# Altium PCB PCB1.PcbDoc (part 5 of 6)
Units mil, origin at the board's own origin, x right, y up, seen from the top; angles counter-clockwise.
Board outline 58000 x 19845 mil, 4 copper layers (Top Layer, MidLayer1, MidLayer2, Bottom Layer); 162 components, 222 nets, 4894 pads, 2245 vias.
Unrouted connection lines stored in the file: 192.
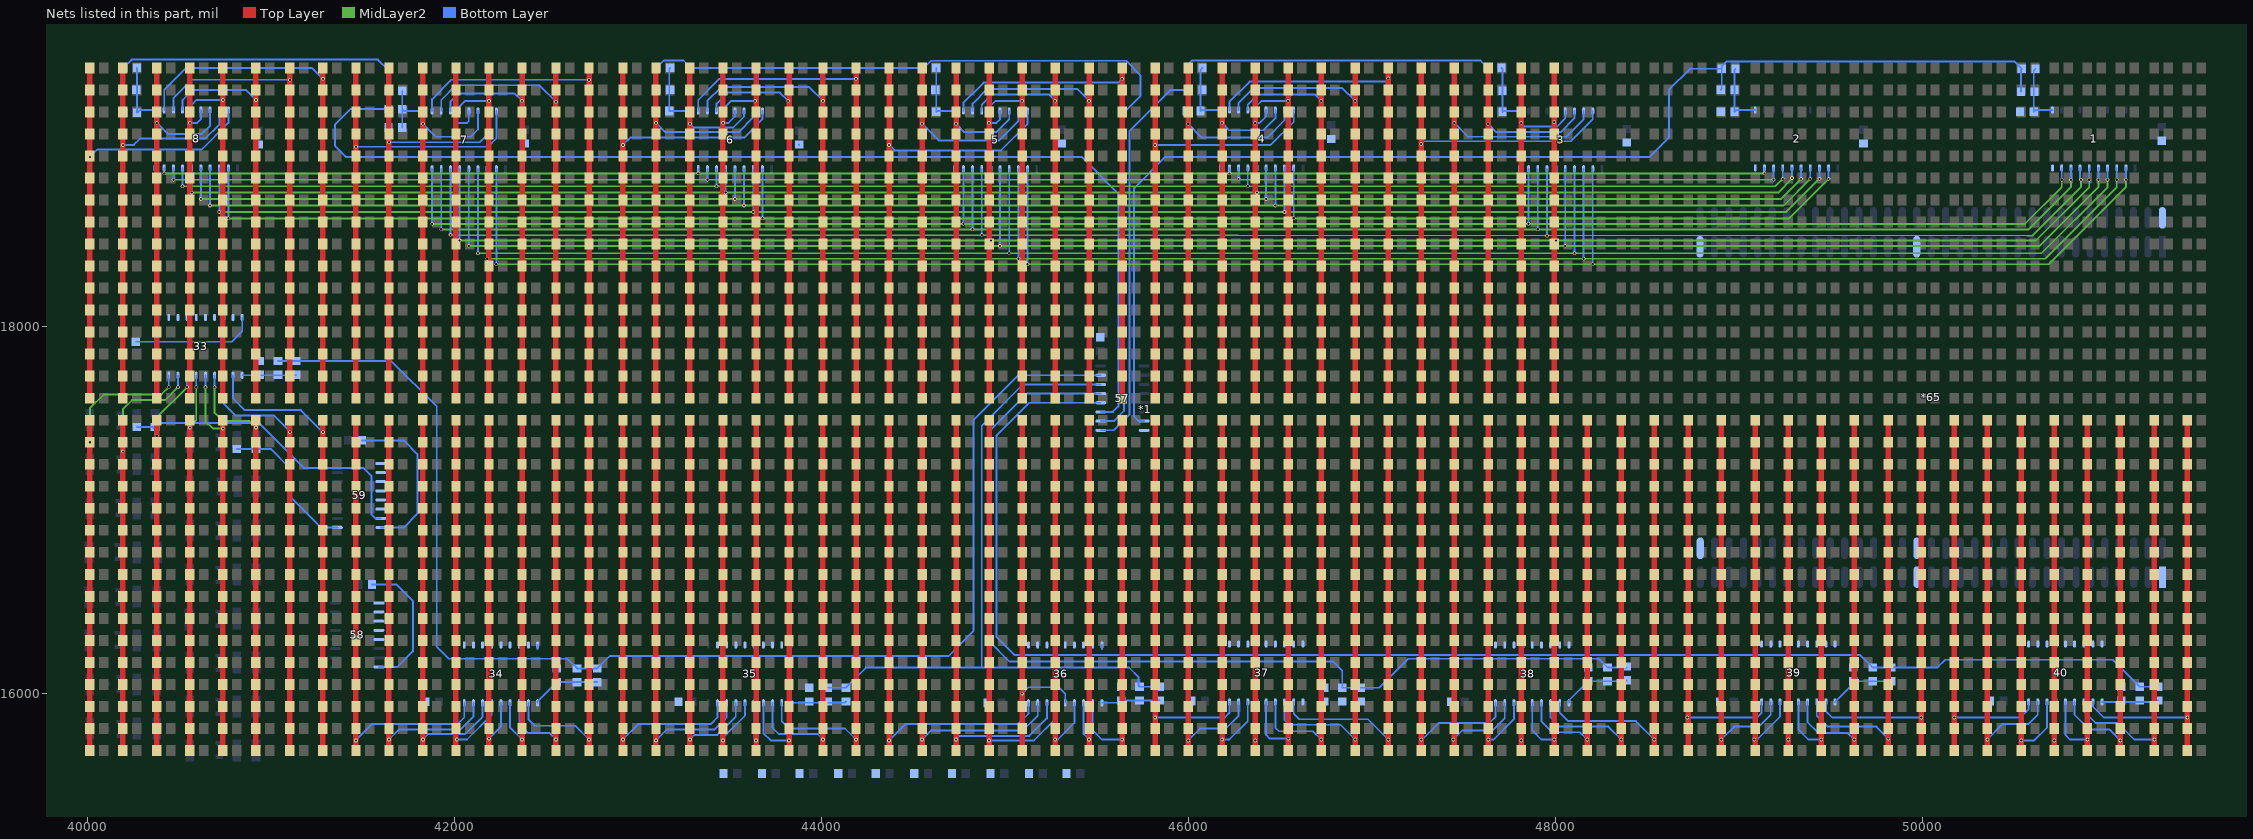
[diagram p7: the nets of this part, all layers, seen from the top]

## Via types
v1: diameter 20, hole 12, Top Layer to MidLayer1, 2032 vias
v2: diameter 20, hole 12, Top Layer to Bottom Layer, 143 vias
v3: diameter 20, hole 12, MidLayer2 to Bottom Layer, 70 vias

## Nets (pads, with @x,y where several pads share a name; then routed paths per layer and width w, separated by ;. In a path a pad name is that pad's centre, name@x,y a point inside that pad or via, vN(x,y) a via of type N, cw(c..) or ccw(c..) an arc to the next point about the centre after c; other vN are vias at no path point) (continued)
AOG14: 59.9 62.2 66.1 | length 816.7
  Bottom Layer w10: 62.2@40815,17332.6 41002.4,17332.6 41100,17235 41100,17080 41275,16905 59.9@41363.78,16905
AOG15: 59.7 63.2 67.1 | length 1677.5
  Bottom Layer w10: 63.2@40270.2,17452.6 67.1@40370,17452.6 40392.4,17475 40935,17475 41180,17230 41505,17230 41550,17185 41550,16975 41570,16955 59.7@41600,16955
CLK1: 34.11 *19.2 *21.2 *.2 | length 376.1
  Bottom Layer w10: 34.11@42455,15950.04 42455,15957.6 *21.2@42560,16062.6 *19.2@42670,16062.6 *.2@42780,16062.6
CLK1_: 33.11 *41.2 *43.2 *45.2 | length 296.1
  Bottom Layer w10: 33.11@40845,17735.04 41137.44,17735.04 *41.2@41140,17737.6
CLK2: 36.11 *18.2 *20.2 *22.2 | length 310.1
  Bottom Layer w10: 36.11@45530,15950.04 36.11@45530,15950.04 *22.2@45630,15950 ; *22.2@45635,15962.6 *18.2@45735,15962.6 *20.2@45845,15962.6
CLK2_: 35.11 *42.2 *44.2 *46.2 | length 303.1
  Bottom Layer w10: 35.11@43835,15950.04 44127.44,15950.04 *42.2@44135,15957.6
CLK3: 38.11 *23.2 *25.2 *27.2 | length 373.1
  Bottom Layer w10: 38.11@48075,15950.04 48075,15962.6 *27.2@48180,16067.6 *25.2@48285,16067.6 48385,16067.6 *23.2@48390,16072.6
CLK3_: 37.11 *47.2 *49.2 *51.2
CLK4: 39.11 *24.2 *26.2 *28.2 | length 359
  Bottom Layer w10: 39.11@49525,15955.04 49625,16055.04 *28.2@49625,16067.6 *26.2@49730,16067.6 *24.2@49830,16067.6
CLK4_: 40.11 *48.2 *50.2 *52.2 | length 308.1
  Bottom Layer w10: 40.11@50980,15955.04 51277.44,15955.04 *48.2@51285,15962.6
CLK5: 7.11 *29.2 *31.2 *33.2 | length 316.8
  Bottom Layer w10: *33.2@41717.4,19085 *31.2@41717.4,19185 ; *29.2@41717.4,19285 *31.2@41717.4,19185 ; 7.11@41830,19174.96 41727.44,19174.96 *31.2@41717.4,19185
CLK5_: 8.11 *53.2 *55.2 *57.2 | length 348.8
  Bottom Layer w10: *53.2@40272.4,19410 *57.2@40272.4,19165 40287.36,19179.96 8.11@40370,19179.96
CLK6: 5.11 *30.2 *32.2 *34.2 | length 339.7
  Bottom Layer w10: *30.2@44627.4,19410 *34.2@44627.4,19170 44632.36,19174.96 5.11@44725,19174.96
CLK6_: 6.11 *54.2 *56.2 *58.2 | length 344.7
  Bottom Layer w10: *56.2@43177.4,19410 43172.4,19405 *58.2@43172.4,19175 *58.2@43172.4,19175 6.11@43280,19174.96
CLK7: 3.11 *35.2 *37.2 *39.2 | length 336.7
  Bottom Layer w10: *35.2@47707.4,19410 47712.4,19405 *37.2@47712.4,19285 *39.2@47712.4,19170 47717.36,19174.96 3.11@47805,19174.96
CLK7_: 4.11 *59.2 *61.2 *63.2 | length 348.8
  Bottom Layer w10: *59.2@46077.4,19410 46067.4,19400 *63.2@46067.4,19175 46072.36,19179.96 4.11@46175,19179.96
CLK8: 2.11 *36.2 *38.2 *40.2 | length 353.8
  Bottom Layer w10: *36.2@48982.4,19405 48977.4,19400 *38.2@48977.4,19290 *40.2@48977.4,19170 48987.36,19179.96 2.11@49090,19179.96
CLK8_: 1.11 *60.2 *62.2 *64.2 | length 345.9
  Bottom Layer w10: *62.2@50617.4,19405 50607.4,19395 *64.2@50607.4,19170 50617.36,19179.96 1.11@50710,19179.96
CLKG1: 57.15 *19.1 *41.1 *43.1 *.1 | length 7280.4
  Bottom Layer w10: *43.1@41040,17812.4 *41.1@41140,17812.4 41657.6,17812.4 41905,17565 41905,16255 41970,16190 42617.4,16190 *19.1@42670,16137.4 *.1@42780,16137.4 42847.6,16205 44695,16205 44830,16340 44830,17490 45075,17735 57.15@45523.78,17735
CLKG2: 57.14 *18.1 *20.1 *42.1 *44.1 | length 3988.6
  Bottom Layer w10: *44.1@44035,16032.4 *42.1@44135,16032.4 44245,16142.4 44870,16142.4 ; 57.14@45523.78,17685 45100,17685 44875,17460 44875,16147.4 44870,16142.4 ; *20.1@45845,16037.4 *18.1@45735,16037.4 45730,16042.4 45730,16090 45677.6,16142.4 44870,16142.4
CLKG3: 57.13 *23.1 *25.1 *47.1 *49.1 | length 5556.7
  Bottom Layer w10: 57.13@45523.78,17635 45120,17635 44910,17425 44910,16290 45025,16175 46790,16175 46840,16125 *47.1@46840,16032.4 *49.1@46940,16032.4 47042.4,16032.4 47200,16190 48237.4,16190 *25.1@48285,16142.4 *23.1@48385,16142.4
CLKG4: 57.12 *24.1 *26.1 *48.1 *50.1 | length 8216.5
  Bottom Layer w10: 57.12@45523.78,17585 45135,17585 44955,17405 44955,16310 45055,16210 49662.4,16210 *26.1@49730,16142.4 *24.1@49830,16142.4 50082.4,16142.4 50125,16185 51037.4,16185 *50.1@51185,16037.4 *48.1@51285,16037.4
CLKG5: 57.11 *29.1 *31.1 *53.1 *55.1 | length 7911.1
  Bottom Layer w10: *55.1@40192.6,19290 40192.6,19405 *53.1@40197.6,19410 40242.6,19455 41585,19455 41642.6,19397.4 *29.1@41642.6,19285 *31.1@41642.6,19185 41435,19185 41350,19100 41350,18985 41410,18925 45420,18925 45620,18725 45620,17565 45590,17535 57.11@45523.78,17535
CLKG6: 57.10 *30.1 *32.1 *54.1 *56.1 | length 4970.4
  Bottom Layer w10: *54.1@43102.6,19290 *56.1@43102.6,19410 43142.6,19450 43250,19450 43290,19410 *30.1@44552.6,19410 ; *32.1@44552.6,19295 *30.1@44552.6,19410 ; 57.10@45523.78,17485 45595,17485 45650,17540 45650,19165 45740,19255 45740,19370 45661.38,19448.62 44598.75,19448.62 44560.13,19410 *30.1@44552.6,19410
CLKG7: 57.9 *35.1 *37.1 *59.1 *61.1 | length 4075.7
  Bottom Layer w10: 57.9@45523.78,17435 45595,17435 45680,17520 45680,19065 45905,19290 *61.1@46002.6,19290 *59.1@46002.6,19410 46002.6,19432.6 46020,19450 47592.6,19450 *35.1@47632.6,19410 47632.6,19290 *37.1@47637.6,19285
CLKG8: 57.7 *36.1 *38.1 *60.1 *62.1 | length 6854.2
  Bottom Layer w10: 57.7@45760,17485 45730,17485 45705,17510 45705,18755 45875,18925 48515,18925 48620,19030 48620,19290 48735,19405 *36.1@48907.6,19405 ; *38.1@48902.6,19290 48907.6,19295 *36.1@48907.6,19405 ; *60.1@50537.6,19280 50537.6,19400 *62.1@50542.6,19405 50502.6,19445 48935,19445 48907.6,19417.6 *36.1@48907.6,19405
GND: 1.10 2.10 3.10 4.10 5.10 6.10 7.10 8.10 33.10 34.10 35.10 36.10 37.10 38.10 39.10 40.10 57.8 58.5 58.8 59.4 59.5 59.8 68.2 69.2 70.2 71.2 72.2 73.2 74.2 75.2 76.2 77.2 78.2 79.2 80.2 81.2 82.2 83.2 84.2 85.2 86.2 87.2 88.2 89.2 90.2 91.2 92.2 93.2 94.2 95.2 96.2 *21.1 *22.1 *27.1 *28.1 *33.1 *34.1 *39.1 *40.1 *45.1 *46.1 *51.1 *52.1 *57.1 *58.1 *63.1 *64.1 *65.1 *65.18 *65.34 *65.49 *65.84 *65.99 *65.132 | length 2371.5
  Bottom Layer w10: 79.2@40265,17917.4 40787.4,17917.4 40845,17975 33.10@40845,18050 ; 96.2@41497.4,17380 41725,17380 41800,17305 41800,16980 41725,16905 59.8@41600,16905 ; 80.2@41552.4,16595 41685,16595 41775,16505 41775,16230 41690,16145 58.8@41590,16145 ; 42455,16242.4 34.10@42455,16265 ; 92.2@43880,18990 92.2@43880,18992.6 ; 45530,16242.4 36.10@45530,16265
INPUT0: 2.2 4.2 6.2 8.2 33.2 35.2 37.2 39.2 | length 9689.1
  MidLayer2 w10: v3(40770,18590) 49275,18590 v3(49490,18805)
  Bottom Layer w10: v3(40770,18590) 8.2@40770,18865 ; v3(43680,18590) 6.2@43680,18860 ; v3(46575,18590) 4.2@46575,18865 ; v3(49490,18805) 2.2@49490,18865
INPUT1: 2.3 4.3 6.3 8.3 33.3 35.3 37.3 39.3 | length 9569.6
  MidLayer2 w10: v3(40720,18625) 49260,18625 v3(49440,18805)
  Bottom Layer w10: v3(40720,18625) 8.3@40720,18865 ; v3(43630,18625) 6.3@43630,18860 ; v3(46525,18625) 4.3@46525,18865 ; v3(49440,18805) 2.3@49440,18865
INPUT2: 2.4 4.4 6.4 8.4 33.4 35.4 37.4 39.4 | length 9450.1
  MidLayer2 w10: v3(40670,18660) 49245,18660 v3(49390,18805)
  Bottom Layer w10: v3(40670,18660) 8.4@40670,18865 ; v3(43580,18660) 6.4@43580,18860 ; v3(46475,18660) 4.4@46475,18865 ; v3(49390,18805) 2.4@49390,18865
INPUT3: 2.5 4.5 6.5 8.5 33.5 35.5 37.5 39.5 | length 9330.6
  MidLayer2 w10: v3(40620,18695) 49230,18695 v3(49340,18805)
  Bottom Layer w10: v3(40620,18695) 8.5@40620,18865 ; v3(43530,18695) 6.5@43530,18860 ; v3(46425,18695) 4.5@46425,18865 ; v3(49340,18805) 2.5@49340,18865
INPUT4: 2.6 4.6 6.6 8.6 33.6 35.6 37.6 39.6 | length 9211.1
  MidLayer2 w10: v3(40570,18730) 49215,18730 v3@49290,18805
  Bottom Layer w10: v3(40570,18730) 8.6@40570,18865 ; v3(43480,18730) 6.6@43480,18860 ; v3(46375,18730) 4.6@46375,18865 ; v3@49290,18805 2.6@49290,18865
  other v3: 49290,18810
INPUT5: 2.7 4.7 6.7 8.7 33.7 35.7 37.7 39.7 | length 9091.6
  MidLayer2 w10: v3(40520,18765) 49200,18765 v3(49240,18805)
  Bottom Layer w10: v3(40520,18765) 8.7@40520,18865 ; v3(43430,18765) 6.7@43430,18860 ; v3(46325,18765) 4.7@46325,18865 ; v3(49240,18805) 2.7@49240,18865
INPUT6: 2.8 4.8 6.8 8.8 33.8 35.8 37.8 39.8 | length 8965
  MidLayer2 w10: v3(40470,18800) v3(49190,18800)
  Bottom Layer w10: v3(40470,18800) 8.8@40470,18865 ; v3(43380,18800) 6.8@43380,18860 ; v3(46275,18805) 4.8@46275,18865 ; v3@49190,18805 2.8@49190,18865
INPUT7: 2.9 4.9 6.9 8.9 33.9 35.9 37.9 39.9 | length 8835
  MidLayer2 w10: v3(40420,18835) v3(49140,18835)
  Bottom Layer w10: v3(40420,18835) 8.9@40420,18865 ; v3(43330,18835) 6.9@43330,18860 ; v3(46225,18835) 4.9@46225,18865 ; v3(49140,18835) 2.9@49140,18865
INPUT8: 1.2 3.2 5.2 7.2 34.2 36.2 38.2 40.2 | length 10719
  MidLayer2 w10: v3(42230,18340) 50690,18340 51110,18760 v3(51110,18800)
  Bottom Layer w10: v3(42230,18340) 7.2@42230,18860 ; v3(45125,18340) 5.2@45125,18860 ; v3(48205,18340) 3.2@48205,18860 ; v3(51110,18800) 1.2@51110,18865
INPUT9: 1.3 3.3 5.3 7.3 34.3 36.3 38.3 40.3 | length 10616.5
  MidLayer2 w10: v3(42180,18370) 50670,18370 51060,18760 v3(51060,18800)
  Bottom Layer w10: v3(42180,18370) 7.3@42180,18860 ; v3(45075,18370) 5.3@45075,18860 ; v3(48155,18370) 3.3@48155,18860 ; v3(51060,18800) 1.3@51060,18865
INPUT10: 1.4 3.4 5.4 7.4 34.4 36.4 38.4 40.4 | length 10514.1
  MidLayer2 w10: v3(42130,18400) 50650,18400 51010,18760 v3(51010,18800)
  Bottom Layer w10: v3(42130,18400) 7.4@42130,18860 ; v3(45025,18400) 5.4@45025,18860 ; v3(48105,18400) 3.4@48105,18860 ; v3(51010,18800) 1.4@51010,18865
INPUT11: 1.5 3.5 5.5 7.5 34.5 36.5 38.5 40.5 | length 10377.5
  MidLayer2 w10: v3(42080,18440) 50640,18440 50960,18760 v3(50960,18800)
  Bottom Layer w10: v3(42080,18440) 7.5@42080,18860 ; v3(44975,18440) 5.5@44975,18860 ; v3(48055,18440) 3.5@48055,18860 ; v3(50960,18800) 1.5@50960,18865
INPUT12: 1.6 3.6 5.6 7.6 34.6 36.6 38.6 40.6 | length 10275.1
  MidLayer2 w10: v3(42030,18470) 42115,18470 50620,18470 50910,18760 v3(50910,18800)
  Bottom Layer w10: v3(42030,18470) 7.6@42030,18860 ; v3(44925,18470) 5.6@44925,18860 ; v3(48005,18470) 3.6@48005,18860 ; v3(50910,18800) 1.6@50910,18865
INPUT13: 1.7 3.7 5.7 7.7 34.7 36.7 38.7 40.7 | length 10186.8
  MidLayer2 w10: v3(41980,18500) 50570,18495 50600,18495 50865,18760 v3(50865,18800)
  Bottom Layer w10: v3(41980,18500) 7.7@41980,18860 ; v3(44875,18500) 5.7@44875,18860 ; v3(47955,18495) 3.7@47955,18860 ; 1.7@50860,18865 50860,18805 v3(50865,18800)
INPUT14: 1.8 3.8 5.8 7.8 34.8 36.8 38.8 40.8 | length 10070.3
  MidLayer2 w10: v3(41930,18530) 50580,18530 50810,18760 v3(50810,18800)
  Bottom Layer w10: v3(41930,18530) 7.8@41930,18860 ; v3(44825,18530) 5.8@44825,18860 ; v3(47905,18530) 3.8@47905,18860 ; v3(50810,18800) 1.8@50810,18865
INPUT15: 1.9 3.9 5.9 7.9 34.9 36.9 38.9 40.9 | length 9967.8
  MidLayer2 w10: v3(41880,18560) 50560,18560 50760,18760 v3(50760,18800)
  Bottom Layer w10: v3(41880,18560) 7.9@41880,18860 ; v3(44775,18560) 5.9@44775,18860 ; v3(47855,18560) 3.9@47855,18860 ; v3(50760,18800) 1.9@50760,18865
Net58_1: 58.1 59.1
Net58_2: 58.2 59.2
Net58_3: 58.3 59.3
Net58_4: 58.4 59.6
Net*1_1: 33.19 *1.1 | length 2647.7
  Top Layer w30: *1.1@40015,15695 *1.1@40015,16655 ; *1.1@40015,17495 *1.1@40015,17490 v2(40015,17370) *1.1@40015,17250 *1.1@40015,17130 *1.1@40015,17010 *1.1@40015,16890 *1.1@40015,16775 ; *1.1@40015,16655 *1.1@40015,16770 *1.1@40015,16775 ; *1.1@40015,16655 *1.1@40015,16775
  MidLayer2 w10: v2(40015,17370) 40015,17555 40090,17630 40405,17630 v3(40445,17670)
  Bottom Layer w10: v3(40445,17670) 33.19@40445,17735.04
Net*1_2: 33.18 *1.2 | length 2444.7
  Top Layer w30: *1.2@40195,15695 *1.2@40195,16650 *1.2@40195,16770 *1.2@40195,16890 *1.2@40195,17010 *1.2@40195,17130 *1.2@40195,17250 *1.2@40195,17370 *1.2@40195,17490 *1.2@40195,17495
  MidLayer2 w10: v2(40195,17320) 40195,17550 40245,17600 40425,17600 v3(40495,17670)
  Bottom Layer w10: v3(40495,17670) 33.18@40495,17735.04
Net*1_3: 33.17 *1.3 | length 2198.4
  Top Layer w30: *1.3@40380,15695 *1.3@40380,16650 *1.3@40380,16770 *1.3@40380,16890 *1.3@40380,17010 *1.3@40380,17130 *1.3@40380,17250 *1.3@40380,17370 *1.3@40380,17490 *1.3@40380,17495
  MidLayer2 w10: v2(40380,17405) 40380,17505 v3(40545,17670)
  Bottom Layer w10: v3(40545,17670) 33.17@40545,17735.04
Net*1_4: 33.16 *1.4 | length 2099.5
  Top Layer w30: *1.4@40560,15695 *1.4@40560,16650 *1.4@40560,16770 *1.4@40560,16890 *1.4@40560,17010 *1.4@40560,17130 *1.4@40560,17250 *1.4@40560,17370 *1.4@40560,17490 *1.4@40560,17495
  MidLayer2 w10: v2(40560,17450) 40560,17455 40595,17490 v3(40595,17670)
  Bottom Layer w10: v3(40595,17670) 33.16@40595,17735.04
Net*1_5: 33.15 *1.5 | length 2161.6
  Top Layer w30: *1.5@40740,15695 *1.5@40740,15810 *1.5@40740,15930 *1.5@40740,16050 *1.5@40740,16170 *1.5@40740,16290 *1.5@40740,16410 *1.5@40740,16530 *1.5@40740,16650 *1.5@40740,16770 *1.5@40740,16890 *1.5@40740,17010 *1.5@40740,17130 *1.5@40740,17250 *1.5@40740,17370 *1.5@40740,17490 *1.5@40740,17495
  MidLayer2 w10: v3(40645,17670) 40645,17485 40685,17445 v2(40740,17445)
  Bottom Layer w10: v3(40645,17670) 33.15@40645,17735.04
Net*1_6: 33.14 *1.6 | length 2263.2
  Top Layer w30: *1.6@40920,15695 *1.6@40920,15810 *1.6@40920,15930 *1.6@40920,16050 *1.6@40920,16170 *1.6@40920,16290 *1.6@40920,16410 *1.6@40920,16530 *1.6@40920,16650 *1.6@40920,16770 *1.6@40920,16890 *1.6@40920,17010 *1.6@40920,17130 *1.6@40920,17250 *1.6@40920,17370 *1.6@40920,17490 *1.6@40920,17495
  MidLayer2 w10: v3(40695,17670) 40695,17530 40740,17485 40885,17485 v2(40920,17450)
  Bottom Layer w10: v3(40695,17670) 33.14@40695,17735.04
Net*1_7: 33.13 *1.7 | length 2382.2
  Top Layer w30: *1.7@41105,15695 *1.7@41105,15810 *1.7@41105,15930 *1.7@41105,16050 *1.7@41105,16170 *1.7@41105,16290 *1.7@41105,16410 *1.7@41105,16530 *1.7@41105,16650 *1.7@41105,16770 *1.7@41105,16890 *1.7@41105,17010 *1.7@41105,17130 *1.7@41105,17250 *1.7@41105,17370 *1.7@41105,17490 *1.7@41105,17495
  Bottom Layer w10: 33.13@40745,17735.04 40745,17580 40810,17515 41020,17515 41105,17430 v2(41105,17425)
Net*1_8: 33.12 *1.8 | length 2491.7
  Top Layer w30: *1.8@41285,15695 *1.8@41285,15810 *1.8@41285,15930 *1.8@41285,16050 *1.8@41285,16170 *1.8@41285,16290 *1.8@41285,16410 *1.8@41285,16530 *1.8@41285,16650 *1.8@41285,16770 *1.8@41285,16890 *1.8@41285,17010 *1.8@41285,17130 *1.8@41285,17250 *1.8@41285,17370 *1.8@41285,17490 *1.8@41285,17495
  Bottom Layer w10: 33.12@40795,17735.04 40795,17610 40860,17545 41165,17545 v2(41285,17425)
Net*1_9: 34.19 *1.9 | length 2521.8
  Top Layer w30: *1.9@41465,15690 *1.9@41465,15810 *1.9@41465,15930 *1.9@41465,16050 *1.9@41465,16170 *1.9@41465,16290 *1.9@41465,16410 *1.9@41465,16530 *1.9@41465,16650 *1.9@41465,16770 *1.9@41465,16890 *1.9@41465,17010 *1.9@41465,17130 *1.9@41465,17250 *1.9@41465,17370 *1.9@41465,17490
  Bottom Layer w10: v2(41465,15745) 41555,15835 42020,15835 42055,15870 34.19@42055,15950.04
Net*1_10: 34.18 *1.10 | length 2386.8
  Top Layer w30: *1.10@41645,15690 *1.10@41645,15810 *1.10@41645,15930 *1.10@41645,16050 *1.10@41645,16170 *1.10@41645,16290 *1.10@41645,16410 *1.10@41645,16530 *1.10@41645,16650 *1.10@41645,16770 *1.10@41645,16890 *1.10@41645,17010 *1.10@41645,17130 *1.10@41645,17250 *1.10@41645,17370 *1.10@41645,17490
  Bottom Layer w10: v2(41645,15750) 41700,15805 42035,15805 42105,15875 34.18@42105,15950.04
Net*1_11: 34.17 *1.11 | length 2251.8
  Top Layer w30: *1.11@41830,15690 *1.11@41830,15810 *1.11@41830,15930 *1.11@41830,16050 *1.11@41830,16170 *1.11@41830,16290 *1.11@41830,16410 *1.11@41830,16530 *1.11@41830,16650 *1.11@41830,16770 *1.11@41830,16890 *1.11@41830,17010 *1.11@41830,17130 *1.11@41830,17250 *1.11@41830,17370 *1.11@41830,17490
  Bottom Layer w10: v2(41830,15750) 41860,15780 42060,15780 42155,15875 34.17@42155,15950.04
Net*1_12: 34.16 *1.12 | length 2111
  Top Layer w30: *1.12@42010,15690 *1.12@42010,15810 *1.12@42010,15930 *1.12@42010,16050 *1.12@42010,16170 *1.12@42010,16290 *1.12@42010,16410 *1.12@42010,16530 *1.12@42010,16650 *1.12@42010,16770 *1.12@42010,16890 *1.12@42010,17010 *1.12@42010,17130 *1.12@42010,17250 *1.12@42010,17370 *1.12@42010,17490
  Bottom Layer w10: v2(42015,15750) 42070,15750 42205,15885 34.16@42205,15950.04
Net*1_13: 34.15 *1.13 | length 2022
  Top Layer w30: *1.13@42190,15690 *1.13@42190,15810 *1.13@42190,15930 *1.13@42190,16050 *1.13@42190,16170 *1.13@42190,16290 *1.13@42190,16410 *1.13@42190,16530 *1.13@42190,16650 *1.13@42190,16770 *1.13@42190,16890 *1.13@42190,17010 *1.13@42190,17130 *1.13@42190,17250 *1.13@42190,17370 *1.13@42190,17490
  Bottom Layer w10: v2(42190,15755) 42255,15820 34.15@42255,15950.04
Net*1_14: 34.14 *1.14 | length 2027
  Top Layer w30: *1.14@42370,15690 *1.14@42370,15810 *1.14@42370,15930 *1.14@42370,16050 *1.14@42370,16170 *1.14@42370,16290 *1.14@42370,16410 *1.14@42370,16530 *1.14@42370,16650 *1.14@42370,16770 *1.14@42370,16890 *1.14@42370,17010 *1.14@42370,17130 *1.14@42370,17250 *1.14@42370,17370 *1.14@42370,17490
  Bottom Layer w10: 34.14@42305,15950.04 42305,15815 v2(42370,15750)
Net*1_15: 34.13 *1.15 | length 2150.2
  Top Layer w30: *1.15@42555,15690 *1.15@42555,15810 *1.15@42555,15930 *1.15@42555,16050 *1.15@42555,16170 *1.15@42555,16290 *1.15@42555,16410 *1.15@42555,16530 *1.15@42555,16650 *1.15@42555,16770 *1.15@42555,16890 *1.15@42555,17010 *1.15@42555,17130 *1.15@42555,17250 *1.15@42555,17370 *1.15@42555,17490
  Bottom Layer w10: 34.13@42355,15950.04 42355,15835 42405,15785 42520,15785 v2(42555,15750)
Net*1_16: 34.12 *1.16 | length 2265.6
  Top Layer w30: *1.16@42735,15690 *1.16@42735,15810 *1.16@42735,15930 *1.16@42735,16050 *1.16@42735,16170 *1.16@42735,16290 *1.16@42735,16410 *1.16@42735,16530 *1.16@42735,16650 *1.16@42735,16770 *1.16@42735,16890 *1.16@42735,17010 *1.16@42735,17130 *1.16@42735,17250 *1.16@42735,17370 *1.16@42735,17490
  Bottom Layer w10: 34.12@42405,15950.04 42405,15860 42440,15825 42660,15825 v2(42735,15750)
Net*1_17: 35.19 *1.17 | length 3144.7
  Top Layer w30: *1.17@42920,15700 *1.17@42920,15810 *1.17@42920,15930 *1.17@42920,15940 ; *1.17@42920,16170 *1.17@42920,16060 ; *1.17@42920,16410 *1.17@42920,16300 ; *1.17@42920,17020 *1.17@42920,17260 ; *1.17@42920,17140 *1.17@42920,17260 ; *1.17@42920,17500 *1.17@42920,17260 ; *1.17@42920,15940 *1.17@42920,16050 *1.17@42920,16060 ; *1.17@42920,15940 *1.17@42920,16060 ; *1.17@42920,16060 *1.17@42920,16290 *1.17@42920,16300 ; *1.17@42920,16300 *1.17@42920,16530 *1.17@42920,17260
  Bottom Layer w10: v2(42920,15750) 43005,15835 43400,15835 43435,15870 35.19@43435,15950.04
Net*1_18: 35.18 *1.18 | length 2916.8
  Top Layer w30: *1.18@43100,15700 *1.18@43100,15810 *1.18@43100,15930 *1.18@43100,15940 ; *1.18@43100,16060 *1.18@43100,15940 ; *1.18@43100,16540 *1.18@43100,16420 ; *1.18@43100,16900 *1.18@43100,17140 ; *1.18@43100,17020 *1.18@43100,17140 ; *1.18@43100,17500 *1.18@43100,17140 ; *1.18@43100,15940 *1.18@43100,16420 ; *1.18@43100,16420 *1.18@43100,17140
  Bottom Layer w10: v2(43100,15745) 43160,15805 43420,15805 43485,15870 35.18@43485,15950.04
Net*1_19: 35.17 *1.19 | length 2296.8
  Top Layer w30: *1.19@43285,15700 *1.19@43285,15810 *1.19@43285,16060 ; *1.19@43285,16180 *1.19@43285,16060 ; *1.19@43285,17500 43285,17140 *1.19@43285,16060
  Bottom Layer w10: v2(43285,15750) 43310,15775 43435,15775 43535,15875 35.17@43535,15950.04
Net*1_20: 35.16 *1.20 | length 2414.7
  Top Layer w30: *1.20@43465,15700 *1.20@43465,15810 *1.20@43465,15930 *1.20@43465,16540 ; *1.20@43465,16420 *1.20@43465,16540 ; *1.20@43465,16660 *1.20@43465,16540 ; *1.20@43465,17260 *1.20@43465,17140 ; *1.20@43465,17500 *1.20@43465,17140 ; *1.20@43465,16540 *1.20@43465,17140
  Bottom Layer w10: v2(43465,15745) 43465,15760 43585,15880 35.16@43585,15950.04
Net*1_21: 35.15 *1.21 | length 2369.2
  Top Layer w30: *1.21@43645,15700 *1.21@43645,15810 *1.21@43645,15930 *1.21@43645,16050 *1.21@43645,16540 ; *1.21@43645,16420 *1.21@43645,16540 ; *1.21@43645,16660 *1.21@43645,16540 ; *1.21@43645,17260 *1.21@43645,17140 ; *1.21@43645,17500 *1.21@43645,17140 ; *1.21@43645,16540 *1.21@43645,17140
  Bottom Layer w10: 35.15@43635,15950.04 43635,15755 v2(43645,15745)
Net*1_22: 35.14 *1.22 | length 2481.6
  Top Layer w30: *1.22@43825,15700 *1.22@43825,15810 *1.22@43825,16540 ; *1.22@43825,16420 *1.22@43825,16540 ; *1.22@43825,16660 *1.22@43825,16540 ; *1.22@43825,17260 *1.22@43825,17140 ; *1.22@43825,17500 *1.22@43825,17140 ; *1.22@43825,16540 *1.22@43825,17140
  Bottom Layer w10: 35.14@43685,15950.04 43685,15785 43725,15745 v2(43825,15745)
Net*1_23: 35.13 *1.23 | length 2837
  Top Layer w30: *1.23@44010,15700 *1.23@44010,15810 *1.23@44010,16420 ; *1.23@44010,16300 *1.23@44010,16420 ; *1.23@44010,16540 *1.23@44010,16420 ; *1.23@44010,16900 *1.23@44010,17140 ; *1.23@44010,17020 *1.23@44010,17140 ; *1.23@44010,17500 *1.23@44010,17140 ; *1.23@44010,16420 *1.23@44010,17140
  Bottom Layer w10: 35.13@43735,15950.04 43735,15815 43770,15780 43980,15780 v2(44010,15750)
Net*1_24: 35.12 *1.24 | length 3186.5
  Top Layer w30: *1.24@44190,15700 *1.24@44190,15810 *1.24@44190,15930 *1.24@44190,15940 ; *1.24@44190,16060 *1.24@44190,15940 ; *1.24@44190,16420 *1.24@44190,16300 ; *1.24@44190,16540 *1.24@44190,16300 ; *1.24@44190,16900 *1.24@44190,17140 ; *1.24@44190,17020 *1.24@44190,17140 ; *1.24@44190,17500 *1.24@44190,17140 ; *1.24@44190,15940 *1.24@44190,16300 ; *1.24@44190,16300 *1.24@44190,17140
  Bottom Layer w10: 35.12@43785,15950.04 43785,15850 43825,15810 44130,15810 v2(44190,15750)
Net*1_25: 36.19 *1.25 | length 2680.1
  Top Layer w30: *1.25@44370,15695 *1.25@44370,15810 *1.25@44370,15930 44370,16655 *1.25@44370,17495
  Bottom Layer w10: v2(44370,15745) 44460,15835 45075,15835 45130,15890 36.19@45130,15950.04
Net*1_26: 36.18 *1.26 | length 2553.9
  Top Layer w30: *1.26@44550,15695 *1.26@44550,15810 *1.26@44550,15930 44550,16655 *1.26@44550,17495
  Bottom Layer w10: v2(44550,15750) 44600,15800 45100,15800 45180,15880 36.18@45180,15950.04
Net*1_27: 36.17 *1.27 | length 2427.7
  Top Layer w30: *1.27@44735,15695 *1.27@44735,15810 44735,16655 44735,17135 *1.27@44735,17495
  Bottom Layer w10: v2(44735,15750) 44755,15770 45135,15770 45230,15865 36.17@45230,15950.04
Net*1_28: 36.16 *1.28 | length 2299.7
  Top Layer w30: *1.28@44915,15695 *1.28@44915,15810 *1.28@44915,17495
  Bottom Layer w10: v2(44915,15745) 45160,15745 45280,15865 36.16@45280,15950.04
Net*1_29: 36.15 *1.29 | length 2834
  Top Layer w30: *1.29@45095,15810 *1.29@45095,15695 ; *1.29@45095,15815 *1.29@45095,15695 ; *1.29@45095,15930 *1.29@45095,15935 ; *1.29@45095,16175 *1.29@45095,16170 ; *1.29@45095,16410 *1.29@45095,16295 ; *1.29@45095,17015 *1.29@45095,17255 ; *1.29@45095,17135 *1.29@45095,17255 ; *1.29@45095,17495 *1.29@45095,17255 ; *1.29@45095,15695 *1.29@45095,15935 ; *1.29@45095,15935 *1.29@45095,16050 *1.29@45095,16170 ; *1.29@45095,16170 *1.29@45095,16290 *1.29@45095,16295 ; *1.29@45095,16295 *1.29@45095,16530 *1.29@45095,17255
  Bottom Layer w10: v2(45095,16000) 45130,16035 45295,16035 45330,16000 36.15@45330,15950.04
Net*1_30: 36.14 *1.30 | length 2052.3
  Top Layer w30: *1.30@45275,15695 *1.30@45275,15810 *1.30@45275,15930 *1.30@45275,17495
  Bottom Layer w10: v2(45275,15750) 45290,15750 45380,15840 36.14@45380,15950.04
Net*1_31: 36.13 *1.31 | length 2012.5
  Top Layer w30: *1.31@45460,15695 *1.31@45460,15810 *1.31@45460,17495
  Bottom Layer w10: 36.13@45430,15950.04 45430,15780 v2(45460,15750)
Net*1_32: 36.12 *1.32 | length 2130.8
  Top Layer w30: *1.32@45640,15695 *1.32@45640,15810 *1.32@45640,17495
  Bottom Layer w10: 36.12@45480,15950.04 45480,15800 45530,15750 v2(45640,15750)
Net*1_33: 37.19 *1.33 | length 2275.4
  Top Layer w30: *1.33@45820,15695 *1.33@45820,15930 *1.33@45820,17495
  Bottom Layer w10: v2(45820,15870) 46200,15870 46225,15895 37.19@46225,15955.04
Net*1_34: 37.18 *1.34 | length 2206
  Top Layer w30: *1.34@46000,15695 *1.34@46000,15810 *1.34@46000,15930 46000,16655 *1.34@46000,17495
  Bottom Layer w10: v2(46000,15745) 46065,15810 46205,15810 46275,15880 37.18@46275,15955.04
Net*1_35: 37.17 *1.35 | length 2086.5
  Top Layer w30: *1.35@46185,15695 *1.35@46185,15810 *1.35@46185,17495
  Bottom Layer w10: v2(46185,15750) 46225,15750 46325,15850 37.17@46325,15955.04
Net*1_36: 37.16 *1.36 | length 2014.2
  Top Layer w30: *1.36@46365,15695 *1.36@46365,15810 *1.36@46365,15930 *1.36@46365,16050 *1.36@46365,17495
  Bottom Layer w10: v2(46365,15745) 46375,15755 37.16@46375,15955.04
Net*1_37: 37.15 *1.37 | length 2108.3
  Top Layer w30: *1.37@46545,15695 *1.37@46545,15810 *1.37@46545,17495
  Bottom Layer w10: 37.15@46425,15955.04 46425,15775 46445,15755 v2(46545,15755)
Net*1_38: 37.14 *1.38 | length 2217
  Top Layer w30: *1.38@46725,15695 *1.38@46725,15810 *1.38@46725,15930 *1.38@46725,16050 *1.38@46725,16170 *1.38@46725,16290 *1.38@46725,16410 *1.38@46725,16530 *1.38@46725,16650 *1.38@46725,16770 *1.38@46725,16890 *1.38@46725,17010 *1.38@46725,17130 *1.38@46725,17250 *1.38@46725,17370 *1.38@46725,17490 *1.38@46725,17495
  Bottom Layer w10: 37.14@46475,15955.04 46475,15815 46495,15795 46680,15795 v2(46725,15750)
Net*1_39: 37.13 *1.39 | length 2328.5
  Top Layer w30: *1.39@46910,15695 *1.39@46910,15810 *1.39@46910,15930 46910,17135 *1.39@46910,17495
  Bottom Layer w10: 37.13@46525,15955.04 46525,15855 46550,15830 46830,15830 v2(46910,15750)
Net*1_40: 37.12 *1.40 | length 2438
  Top Layer w30: *1.40@47090,15695 *1.40@47090,15810 *1.40@47090,15930 47090,17135 *1.40@47090,17495
  Bottom Layer w10: 37.12@46575,15955.04 46575,15890 46605,15860 46980,15860 v2(47090,15750)
Net*1_41: 38.19 *1.41 | length 2331.8
  Top Layer w30: *1.41@47270,15690 *1.41@47270,15810 *1.41@47270,15930 *1.41@47270,16050 *1.41@47270,16170 *1.41@47270,16290 *1.41@47270,16410 *1.41@47270,16530 *1.41@47270,16650 *1.41@47270,16770 *1.41@47270,16890 *1.41@47270,17010 *1.41@47270,17130 *1.41@47270,17250 *1.41@47270,17370 *1.41@47270,17490
  Bottom Layer w10: v2(47270,15750) 47275,15750 47365,15840 47640,15840 47675,15875 38.19@47675,15950.04
Net*1_42: 38.18 *1.42 | length 2212.7
  Top Layer w30: *1.42@47450,15690 *1.42@47450,15810 *1.42@47450,15930 *1.42@47450,16050 *1.42@47450,16170 *1.42@47450,16290 *1.42@47450,16410 *1.42@47450,16530 *1.42@47450,16650 *1.42@47450,16770 *1.42@47450,16890 *1.42@47450,17010 *1.42@47450,17130 *1.42@47450,17250 *1.42@47450,17370 *1.42@47450,17490
  Bottom Layer w10: v2(47445,15750) 47495,15800 47660,15800 47725,15865 38.18@47725,15950.04
Net*1_43: 38.17 *1.43 | length 2075.6
  Top Layer w30: *1.43@47635,15690 *1.43@47635,15810 *1.43@47635,15930 *1.43@47635,16050 *1.43@47635,16170 *1.43@47635,16290 *1.43@47635,16410 *1.43@47635,16530 *1.43@47635,16650 *1.43@47635,16770 *1.43@47635,16890 *1.43@47635,17010 *1.43@47635,17130 *1.43@47635,17250 *1.43@47635,17370 *1.43@47635,17490
  Bottom Layer w10: v2(47635,15750) 47665,15750 47775,15860 38.17@47775,15950.04
Net*1_44: 38.16 *1.44 | length 2009.2
  Top Layer w30: *1.44@47815,15690 *1.44@47815,15810 *1.44@47815,15930 *1.44@47815,16050 *1.44@47815,16170 *1.44@47815,16290 *1.44@47815,16410 *1.44@47815,16530 *1.44@47815,16650 *1.44@47815,16770 *1.44@47815,16890 *1.44@47815,17010 *1.44@47815,17130 *1.44@47815,17250 *1.44@47815,17370 *1.44@47815,17490
  Bottom Layer w10: v2(47815,15745) 47825,15755 38.16@47825,15950.04
Net*1_45: 38.15 *1.45 | length 2090.8
  Top Layer w30: *1.45@47995,15690 *1.45@47995,15810 *1.45@47995,15930 *1.45@47995,16050 *1.45@47995,16170 *1.45@47995,16290 *1.45@47995,16410 *1.45@47995,16530 *1.45@47995,16650 *1.45@47995,16770 *1.45@47995,16890 *1.45@47995,17010 *1.45@47995,17130 *1.45@47995,17250 *1.45@47995,17370 *1.45@47995,17490
  Bottom Layer w10: 38.15@47875,15950.04 47875,15800 47925,15750 v2(47995,15750)
Net*1_46: 38.14 *1.46 | length 2191.5
  Top Layer w30: *1.46@48175,15690 *1.46@48175,15810 *1.46@48175,15930 *1.46@48175,16050 *1.46@48175,16170 *1.46@48175,16290 *1.46@48175,16410 *1.46@48175,16530 *1.46@48175,16650 *1.46@48175,16770 *1.46@48175,16890 *1.46@48175,17010 *1.46@48175,17130 *1.46@48175,17250 *1.46@48175,17370 *1.46@48175,17490
  Bottom Layer w10: 38.14@47925,15950.04 47925,15850 47985,15790 48135,15790 v2(48175,15750)
Net*1_47: 38.13 *1.47 | length 2314.7
  Top Layer w30: *1.47@48360,15690 *1.47@48360,15810 *1.47@48360,15930 *1.47@48360,16050 *1.47@48360,16170 *1.47@48360,16290 *1.47@48360,16410 *1.47@48360,16530 *1.47@48360,16650 *1.47@48360,16770 *1.47@48360,16890 *1.47@48360,17010 *1.47@48360,17130 *1.47@48360,17250 *1.47@48360,17370 *1.47@48360,17490
  Bottom Layer w10: 38.13@47975,15950.04 47975,15870 48025,15820 48290,15820 v2(48360,15750)
Net*1_48: 38.12 *1.48 | length 2430.1
  Top Layer w30: *1.48@48540,15690 *1.48@48540,15810 *1.48@48540,15930 *1.48@48540,16050 *1.48@48540,16170 *1.48@48540,16290 *1.48@48540,16410 *1.48@48540,16530 *1.48@48540,16650 *1.48@48540,16770 *1.48@48540,16890 *1.48@48540,17010 *1.48@48540,17130 *1.48@48540,17250 *1.48@48540,17370 *1.48@48540,17490
  Bottom Layer w10: 38.12@48025,15950.04 48025,15895 48070,15850 48440,15850 v2(48540,15750)
Net*1_49: 39.19 *1.49 | length 2275.4
  Top Layer w30: *1.49@48725,15700 *1.49@48725,15930 *1.49@48725,17500
  Bottom Layer w10: v2(48720,15870) 49100,15870 49125,15895 39.19@49125,15955.04
Net*1_50: 39.18 *1.50 | length 2196
  Top Layer w30: *1.50@48905,15700 *1.50@48905,15810 *1.50@48905,15930 48905,16660 *1.50@48905,17500
  Bottom Layer w10: v2(48905,15750) 48975,15820 49110,15820 49175,15885 39.18@49175,15955.04
Net*1_51: 39.17 *1.51 | length 2071.8
  Top Layer w30: *1.51@49090,15700 *1.51@49090,15810 *1.51@49090,15930 *1.51@49090,17500
  Bottom Layer w10: v2(49085,15750) 49100,15750 49225,15875 39.17@49225,15955.04
Net*1_52: 39.16 *1.52 | length 2007.1
  Top Layer w30: *1.52@49270,15700 *1.52@49270,15810 *1.52@49270,15930 *1.52@49270,16050 *1.52@49270,17500
  Bottom Layer w10: v2(49270,15750) 49275,15755 39.16@49275,15955.04
Net*1_53: 39.15 *1.53 | length 2097.8
  Top Layer w30: *1.53@49450,15700 *1.53@49450,15810 *1.53@49450,17500
  Bottom Layer w10: 39.15@49325,15955.04 49325,15805 49380,15750 v2(49450,15750)
Net*1_54: 39.14 *1.54 | length 2204.4
  Top Layer w30: *1.54@49630,15700 *1.54@49630,15810 *1.54@49630,17500
  Bottom Layer w10: 39.14@49375,15955.04 49375,15845 49435,15785 49595,15785 v2(49630,15750)
Net*1_55: 39.13 *1.55 | length 2316.8
  Top Layer w30: *1.55@49815,15700 *1.55@49815,15810 *1.55@49815,15930 49815,17140 *1.55@49815,17500
  Bottom Layer w10: 39.13@49425,15955.04 49425,15880 49485,15820 49750,15820 v2(49815,15755)
Net*1_56: 39.12 *1.56 | length 2384.5
  Top Layer w30: *1.56@49995,15700 *1.56@49995,15930 *1.56@49995,17500
  Bottom Layer w10: 39.12@49475,15955.04 49475,15905 49510,15870 v2(49995,15870)
Net*1_57: 40.19 *1.57 | length 2263.7
  Top Layer w30: *1.57@50175,15695 *1.57@50175,15930 *1.57@50175,17495
  Bottom Layer w10: v2(50175,15870) 50535,15870 50580,15915 40.19@50580,15955.04
Net*1_58: 40.18 *1.58 | length 2921
  Top Layer w30: *1.58@50355,15695 *1.58@50355,15810 *1.58@50355,15930 *1.58@50355,16050 *1.58@50355,16170 *1.58@50355,16295 ; *1.58@50355,16415 *1.58@50355,16295 ; *1.58@50355,16535 *1.58@50355,16295 ; *1.58@50355,16895 *1.58@50355,17135 ; *1.58@50355,17015 *1.58@50355,17135 ; *1.58@50355,17495 *1.58@50355,17135 ; *1.58@50355,16295 *1.58@50355,17135
  Bottom Layer w10: v2(50355,15750) 50440,15835 50580,15835 50630,15885 40.18@50630,15955.04
Net*1_59: 40.17 *1.59 | length 3189
  Top Layer w30: *1.59@50540,15695 *1.59@50540,15810 *1.59@50540,15815 ; *1.59@50540,15935 *1.59@50540,15815 ; *1.59@50540,16055 *1.59@50540,15815 ; *1.59@50540,16415 *1.59@50540,16295 ; *1.59@50540,16535 *1.59@50540,16295 ; *1.59@50540,16895 *1.59@50540,17135 ; *1.59@50540,17015 *1.59@50540,17135 ; *1.59@50540,17495 *1.59@50540,17135 ; *1.59@50540,15815 *1.59@50540,16295 ; *1.59@50540,16295 *1.59@50540,17135
  Bottom Layer w10: v2(50540,15745) 50610,15745 50680,15815 40.17@50680,15955.04
Net*1_60: 40.16 *1.60 | length 2734.2
  Top Layer w30: *1.60@50720,15695 *1.60@50720,15810 *1.60@50720,15930 *1.60@50720,16050 *1.60@50720,16295 ; *1.60@50720,16415 *1.60@50720,16295 ; *1.60@50720,16535 *1.60@50720,16295 ; *1.60@50720,16895 *1.60@50720,17135 ; *1.60@50720,17015 *1.60@50720,17135 ; *1.60@50720,17495 *1.60@50720,17135 ; *1.60@50720,16295 *1.60@50720,17135
  Bottom Layer w10: v2(50720,15745) 50730,15755 40.16@50730,15955.04
Net*1_61: 40.15 *1.61 | length 2815.4
  Top Layer w30: *1.61@50900,15695 *1.61@50900,15810 *1.61@50900,15815 ; *1.61@50900,15930 *1.61@50900,15815 ; *1.61@50900,16290 *1.61@50900,16175 ; *1.61@50900,16410 *1.61@50900,16415 ; *1.61@50900,16650 *1.61@50900,16535 ; *1.61@50900,16890 *1.61@50900,16775 ; *1.61@50900,17495 *1.61@50900,17010 *1.61@50900,16775 ; *1.61@50900,15815 *1.61@50900,16050 *1.61@50900,16055 ; *1.61@50900,16055 *1.61@50900,16175 ; *1.61@50900,16055 *1.61@50900,16170 *1.61@50900,16175 ; *1.61@50900,16175 *1.61@50900,16415 ; *1.61@50900,16415 *1.61@50900,16535 ; *1.61@50900,16415 *1.61@50900,16530 *1.61@50900,16535 ; *1.61@50900,16535 *1.61@50900,16770 *1.61@50900,16775
  Bottom Layer w10: 40.15@50780,15955.04 50780,15775 50805,15750 v2(50900,15750)
Net*1_62: 40.14 *1.62 | length 2658
  Top Layer w30: *1.62@51080,15695 *1.62@51080,15810 *1.62@51080,15930 *1.62@51080,15935 ; *1.62@51080,16055 *1.62@51080,15935 ; *1.62@51080,16895 *1.62@51080,17135 ; *1.62@51080,17015 *1.62@51080,17135 ; *1.62@51080,17495 *1.62@51080,17135 ; *1.62@51080,15935 *1.62@51080,17135
  Bottom Layer w10: 40.14@50830,15955.04 50830,15885 50910,15805 51020,15805 v2(51080,15745)
Net*1_63: 40.13 *1.63 | length 2299.2
  Top Layer w30: *1.63@51265,15695 *1.63@51265,15810 *1.63@51265,17495
  Bottom Layer w10: 40.13@50880,15955.04 50880,15905 50945,15840 51065,15840 51155,15750 v2(51265,15750)
Net*1_64: 40.12 *1.64 | length 2364.9
  Top Layer w30: *1.64@51445,15695 *1.64@51445,15930 *1.64@51445,17495
  Bottom Layer w10: 40.12@50930,15955.04 50930,15930 50990,15870 v2(51445,15870)
Net*1_81: 8.19 *1.81 | length 2701.6
  Top Layer w30: *1.81@40015,17610 *1.81@40015,17730 *1.81@40015,17850 *1.81@40015,17970 *1.81@40015,18090 *1.81@40015,18210 *1.81@40015,18330 *1.81@40015,18450 *1.81@40015,18570 *1.81@40015,18690 *1.81@40015,18810 *1.81@40015,18930 *1.81@40015,19050 *1.81@40015,19170 *1.81@40015,19290 *1.81@40015,19410
  Bottom Layer w10: v2(40015,18925) 40055,18965 40625,18965 40770,19110 8.19@40770,19179.96
Net*1_82: 8.18 *1.82 | length 2450.5
  Top Layer w30: *1.82@40195,17610 *1.82@40195,17730 *1.82@40195,17850 *1.82@40195,17970 *1.82@40195,18090 *1.82@40195,18210 *1.82@40195,18330 *1.82@40195,18450 *1.82@40195,18570 *1.82@40195,18690 *1.82@40195,18810 *1.82@40195,18930 *1.82@40195,19050 *1.82@40195,19170 *1.82@40195,19290 *1.82@40195,19410
  Bottom Layer w10: v2(40195,18990) 40255,18990 40290,19025 40645,19025 40720,19100 8.18@40720,19179.96
Net*1_83: 8.17 *1.83 | length 2218.5
  Top Layer w30: *1.83@40380,17610 *1.83@40380,17730 *1.83@40380,17850 *1.83@40380,17970 *1.83@40380,18090 *1.83@40380,18210 *1.83@40380,18330 *1.83@40380,18450 *1.83@40380,18570 *1.83@40380,18690 *1.83@40380,18810 *1.83@40380,18930 *1.83@40380,19050 *1.83@40380,19170 *1.83@40380,19290 *1.83@40380,19410
  Bottom Layer w10: v2(40380,19110) 40440,19050 40625,19050 40670,19095 8.17@40670,19179.96
Net*1_84: 8.16 *1.84 | length 1918.2
  Top Layer w30: *1.84@40560,17610 *1.84@40560,17730 *1.84@40560,17850 *1.84@40560,17970 *1.84@40560,18090 *1.84@40560,18210 *1.84@40560,18330 *1.84@40560,18450 *1.84@40560,18570 *1.84@40560,18690 *1.84@40560,18810 *1.84@40560,18930 *1.84@40560,19050 *1.84@40560,19170 *1.84@40560,19290 *1.84@40560,19410
  Bottom Layer w10: v2(40560,19110) 40600,19110 40620,19130 8.16@40620,19179.96
Net*1_85: 8.15 *1.85 | length 2010.4
  Top Layer w30: *1.85@40740,17610 *1.85@40740,17730 *1.85@40740,17850 *1.85@40740,17970 *1.85@40740,18090 *1.85@40740,18210 *1.85@40740,18330 *1.85@40740,18450 *1.85@40740,18570 *1.85@40740,18690 *1.85@40740,18810 *1.85@40740,18930 *1.85@40740,19050 *1.85@40740,19170 *1.85@40740,19290 *1.85@40740,19410
  Bottom Layer w10: 8.15@40570,19179.96 40570,19210 40595,19235 v2(40740,19235)
Net*1_86: 8.14 *1.86 | length 2300.6
  Top Layer w30: *1.86@40920,17610 *1.86@40920,17730 *1.86@40920,17850 *1.86@40920,17970 *1.86@40920,18090 *1.86@40920,18210 *1.86@40920,18330 *1.86@40920,18450 *1.86@40920,18570 *1.86@40920,18690 *1.86@40920,18810 *1.86@40920,18930 *1.86@40920,19050 *1.86@40920,19170 *1.86@40920,19290 *1.86@40920,19410
  Bottom Layer w10: 8.14@40520,19179.96 40520,19235 40575,19290 40865,19290 v2(40920,19235)
Net*1_87: 8.13 *1.87 | length 2541.5
  Top Layer w30: *1.87@41105,17610 *1.87@41105,17730 *1.87@41105,17850 *1.87@41105,17970 *1.87@41105,18090 *1.87@41105,18210 *1.87@41105,18330 *1.87@41105,18450 *1.87@41105,18570 *1.87@41105,18690 *1.87@41105,18810 *1.87@41105,18930 *1.87@41105,19050 *1.87@41105,19170 *1.87@41105,19290 *1.87@41105,19410
  Bottom Layer w10: 8.13@40470,19179.96 40470,19245 40570,19345 v2(41105,19345)
Net*1_88: 8.12 *1.88 | length 2849.6
  Top Layer w30: *1.88@41285,17610 *1.88@41285,17730 *1.88@41285,17850 *1.88@41285,17970 *1.88@41285,18090 *1.88@41285,18210 *1.88@41285,18330 *1.88@41285,18450 *1.88@41285,18570 *1.88@41285,18690 *1.88@41285,18810 *1.88@41285,18930 *1.88@41285,19050 *1.88@41285,19170 *1.88@41285,19290 *1.88@41285,19410
  Bottom Layer w10: 8.12@40420,19179.96 40420,19290 40540,19410 41225,19410 v2(41285,19350)
Net*1_89: 7.19 *1.89 | length 2733.6
  Top Layer w30: *1.89@41465,17605 *1.89@41465,18930 *1.89@41465,19405
  Bottom Layer w10: v2(41465,18980) 42185,18980 42230,19025 7.19@42230,19174.96
Net*1_90: 7.18 *1.90 | length 2481.5
  Top Layer w30: *1.90@41645,17605 *1.90@41645,18930 *1.90@41645,19405
  Bottom Layer w10: v2(41645,19005) 42140,19005 42180,19045 7.18@42180,19174.96
Net*1_91: 7.17 *1.91 | length 2245.5
  Top Layer w30: *1.91@41830,17605 *1.91@41830,18930 *1.91@41830,19050 *1.91@41830,19405
  Bottom Layer w10: v2(41830,19105) 41900,19035 42090,19035 42130,19075 7.17@42130,19174.96
Net*1_92: 7.16 *1.92 | length 1929.1
  Top Layer w30: *1.92@42010,17605 42010,18445 *1.92@42010,19050 *1.92@42010,19405
  Bottom Layer w10: 42010,19110 42070,19110 42080,19120 7.16@42080,19174.96
Net*1_93: 7.15 *1.93 | length 1997.5
  Top Layer w30: *1.93@42190,17605 *1.93@42190,19170 *1.93@42190,19405
  Bottom Layer w10: 7.15@42030,19174.96 42030,19200 42060,19230 v2(42190,19230)
Net*1_94: 7.14 *1.94 | length 2275.2
  Top Layer w30: *1.94@42370,17605 *1.94@42370,19170 *1.94@42370,19290 *1.94@42370,19405
  Bottom Layer w10: 7.14@41980,19174.96 41980,19225 42025,19270 42330,19270 v2(42370,19230)
Net*1_95: 7.13 *1.95 | length 2555.5
  Top Layer w30: *1.95@42555,17605 *1.95@42555,19170 *1.95@42555,19290 *1.95@42555,19405
  Bottom Layer w10: 7.13@41930,19174.96 41930,19235 42010,19315 42465,19315 v2(42555,19225)
Net*1_96: 7.12 *1.96 | length 2763.5
  Top Layer w30: *1.96@42735,17605 *1.96@42735,19290 *1.96@42735,19405
  Bottom Layer w10: 7.12@41880,19174.96 41880,19240 41985,19345 v2(42735,19345)
Net*1_97: 6.19 *1.97 | length 2663
  Top Layer w30: *1.97@42920,17615 42920,18215 *1.97@42920,19050 *1.97@42920,19415
  Bottom Layer w10: v2(42920,18990) 42960,19030 43580,19030 43680,19130 6.19@43680,19174.96
Net*1_98: 6.18 *1.98 | length 2418.9
  Top Layer w30: *1.98@43100,17615 43100,18215 *1.98@43100,19050 *1.98@43100,19170 *1.98@43100,19415
  Bottom Layer w10: v2(43100,19110) 43150,19060 43550.2,19060 43630,19139.8 6.18@43630,19174.96
Net*1_99: 6.17 *1.99 | length 2158.1
  Top Layer w30: *1.99@43285,17615 *1.99@43285,19170 *1.99@43285,19415
  Bottom Layer w10: v2(43285,19105) 43305,19085 43520,19085 43580,19145 6.17@43580,19174.96
Net*1_100: 6.16 *1.100 | length 1909.5
  Top Layer w30: *1.100@43465,17615 43465,18455 *1.100@43465,19170 *1.100@43465,19415
  Bottom Layer w10: v2(43465,19110) 43495,19110 43530,19145 6.16@43530,19174.96
Net*1_101: 6.15 *1.101 | length 1997.5
  Top Layer w30: *1.101@43645,17615 *1.101@43645,19290 *1.101@43645,19415
  Bottom Layer w10: 6.15@43480,19174.96 43480,19200 43510,19230 v2(43640,19230)
Net*1_102: 6.14 *1.102 | length 2273.5
  Top Layer w30: *1.102@43825,17615 43825,18695 *1.102@43825,19290 *1.102@43825,19410 *1.102@43825,19415
  Bottom Layer w10: 6.14@43430,19174.96 43430,19215 43490,19275 43775,19275 v2(43820,19230)
Net*1_103: 6.13 *1.103 | length 2547.2
  Top Layer w30: *1.103@44010,17615 44010,18695 *1.103@44010,19290 *1.103@44010,19410 *1.103@44010,19415
  Bottom Layer w10: 6.13@43380,19174.96 43380,19230 43455,19305 43935,19305 v2(44010,19230)
Net*1_104: 6.12 *1.104 | length 2767.7
  Top Layer w30: *1.104@44190,17615 *1.104@44190,17730 *1.104@44190,17850 *1.104@44190,17970 *1.104@44190,18090 *1.104@44190,18210 *1.104@44190,18330 *1.104@44190,18450 *1.104@44190,18570 *1.104@44190,18690 *1.104@44190,18810 *1.104@44190,18930 *1.104@44190,19050 *1.104@44190,19170 *1.104@44190,19290 *1.104@44190,19410 *1.104@44190,19415
  Bottom Layer w10: 6.12@43330,19174.96 43330,19235 43445,19350 v2(44190,19350)
Net*1_105: 5.19 *1.105 | length 2697.4
  Top Layer w30: *1.105@44370,17610 *1.105@44370,17730 *1.105@44370,17850 *1.105@44370,17970 *1.105@44370,18090 *1.105@44370,18210 *1.105@44370,18330 *1.105@44370,18450 *1.105@44370,18570 *1.105@44370,18690 *1.105@44370,18810 *1.105@44370,18930 *1.105@44370,19050 *1.105@44370,19170 *1.105@44370,19290 *1.105@44370,19410
  Bottom Layer w10: v2(44370,18990) 44400,18960 44980,18960 45125,19105 5.19@45125,19174.96
Net*1_106: 5.18 *1.106 | length 2460.7
  Top Layer w30: *1.106@44550,17610 *1.106@44550,17730 *1.106@44550,17850 *1.106@44550,17970 *1.106@44550,18090 *1.106@44550,18210 *1.106@44550,18330 *1.106@44550,18450 *1.106@44550,18570 *1.106@44550,18690 *1.106@44550,18810 *1.106@44550,18930 *1.106@44550,19050 *1.106@44550,19170 *1.106@44550,19290 *1.106@44550,19410
  Bottom Layer w10: v2(44550,19105) 44640,19015 44970,19015 45075,19120 5.18@45075,19174.96
Net*1_107: 5.17 *1.107 | length 2182.6
  Top Layer w30: *1.107@44735,17610 *1.107@44735,17730 *1.107@44735,17850 *1.107@44735,17970 *1.107@44735,18090 *1.107@44735,18210 *1.107@44735,18330 *1.107@44735,18450 *1.107@44735,18570 *1.107@44735,18690 *1.107@44735,18810 *1.107@44735,18930 *1.107@44735,19050 *1.107@44735,19170 *1.107@44735,19290 *1.107@44735,19410
  Bottom Layer w10: v2(44735,19105) 44780,19060 44955,19060 45025,19130 5.17@45025,19174.96
Net*1_108: 5.16 *1.108 | length 1913.2
  Top Layer w30: *1.108@44915,17610 *1.108@44915,17730 *1.108@44915,17850 *1.108@44915,17970 *1.108@44915,18090 *1.108@44915,18210 *1.108@44915,18330 *1.108@44915,18450 *1.108@44915,18570 *1.108@44915,18690 *1.108@44915,18810 *1.108@44915,18930 *1.108@44915,19050 *1.108@44915,19170 *1.108@44915,19290 *1.108@44915,19410
  Bottom Layer w10: v2(44915,19110) 44955,19110 44975,19130 5.16@44975,19174.96
Net*1_109: 5.15 *1.109 | length 2010.4
  Top Layer w30: *1.109@45095,17610 *1.109@45095,17730 *1.109@45095,17850 *1.109@45095,17970 *1.109@45095,18090 *1.109@45095,18210 *1.109@45095,18330 *1.109@45095,18450 *1.109@45095,18570 *1.109@45095,18690 *1.109@45095,18810 *1.109@45095,18930 *1.109@45095,19050 *1.109@45095,19170 *1.109@45095,19290 *1.109@45095,19410
  Bottom Layer w10: 5.15@44925,19174.96 44925,19205 44950,19230 v2(45095,19230)
Net*1_110: 5.14 *1.110 | length 2272.3
  Top Layer w30: *1.110@45275,17610 *1.110@45275,17730 *1.110@45275,17850 *1.110@45275,17970 *1.110@45275,18090 *1.110@45275,18210 *1.110@45275,18330 *1.110@45275,18450 *1.110@45275,18570 *1.110@45275,18690 *1.110@45275,18810 *1.110@45275,18930 *1.110@45275,19050 *1.110@45275,19170 *1.110@45275,19290 *1.110@45275,19410
  Bottom Layer w10: 5.14@44875,19174.96 44875,19210 44930,19265 45240,19265 v2(45275,19230)
Net*1_111: 5.13 *1.111 | length 2535.1
  Top Layer w30: *1.111@45460,17610 *1.111@45460,17730 *1.111@45460,17850 *1.111@45460,17970 *1.111@45460,18090 *1.111@45460,18210 *1.111@45460,18330 *1.111@45460,18450 *1.111@45460,18570 *1.111@45460,18690 *1.111@45460,18810 *1.111@45460,18930 *1.111@45460,19050 *1.111@45460,19170 *1.111@45460,19290 *1.111@45460,19410
  Bottom Layer w10: 5.13@44825,19174.96 44825,19215 44905,19295 45395,19295 v2(45460,19230)
Net*1_112: 5.12 *1.112 | length 2763.9
  Top Layer w30: *1.112@45640,17610 *1.112@45640,17730 *1.112@45640,17850 *1.112@45640,17970 *1.112@45640,18090 *1.112@45640,18210 *1.112@45640,18330 *1.112@45640,18450 *1.112@45640,18570 *1.112@45640,18690 *1.112@45640,18810 *1.112@45640,18930 *1.112@45640,19050 *1.112@45640,19170 *1.112@45640,19290 *1.112@45640,19410
  Bottom Layer w10: 5.12@44775,19174.96 44775,19220 44885,19330 45620,19330 v2(45640,19350)
Net*1_113: 4.19 *1.113 | length 2671.7
  Top Layer w30: *1.113@45820,17610 *1.113@45820,17730 *1.113@45820,17850 *1.113@45820,17970 *1.113@45820,18090 *1.113@45820,18210 *1.113@45820,18330 *1.113@45820,18450 *1.113@45820,18570 *1.113@45820,18690 *1.113@45820,18810 *1.113@45820,18930 *1.113@45820,19050 *1.113@45820,19170 *1.113@45820,19290 *1.113@45820,19410
  Bottom Layer w10: v2(45820,18990) 46450,18990 46575,19115 4.19@46575,19179.96
Net*1_114: 4.18 *1.114 | length 2450.4
  Top Layer w30: *1.114@46000,17610 *1.114@46000,17730 *1.114@46000,17850 *1.114@46000,17970 *1.114@46000,18090 *1.114@46000,18210 *1.114@46000,18330 *1.114@46000,18450 *1.114@46000,18570 *1.114@46000,18690 *1.114@46000,18810 *1.114@46000,18930 *1.114@46000,19050 *1.114@46000,19170 *1.114@46000,19290 *1.114@46000,19410
  Bottom Layer w10: v2(46000,19105) 46075,19030 46430,19030 46525,19125 4.18@46525,19179.96
Net*1_115: 4.17 *1.115 | length 2178.5
  Top Layer w30: *1.115@46185,17610 *1.115@46185,17730 *1.115@46185,17850 *1.115@46185,17970 *1.115@46185,18090 *1.115@46185,18210 *1.115@46185,18330 *1.115@46185,18450 *1.115@46185,18570 *1.115@46185,18690 *1.115@46185,18810 *1.115@46185,18930 *1.115@46185,19050 *1.115@46185,19170 *1.115@46185,19290 *1.115@46185,19410
  Bottom Layer w10: v2(46185,19110) 46225,19070 46410,19070 46475,19135 4.17@46475,19179.96
Net*1_116: 4.16 *1.116 | length 1909.5
  Top Layer w30: *1.116@46365,17610 *1.116@46365,17730 *1.116@46365,17850 *1.116@46365,17970 *1.116@46365,18090 *1.116@46365,18210 *1.116@46365,18330 *1.116@46365,18450 *1.116@46365,18570 *1.116@46365,18690 *1.116@46365,18810 *1.116@46365,18930 *1.116@46365,19050 *1.116@46365,19170 *1.116@46365,19290 *1.116@46365,19410
  Bottom Layer w10: v2(46365,19110) 46390,19110 46425,19145 4.16@46425,19179.96
Net*1_117: 4.15 *1.117 | length 2005.4
  Top Layer w30: *1.117@46545,17610 *1.117@46545,17730 *1.117@46545,17850 *1.117@46545,17970 *1.117@46545,18090 *1.117@46545,18210 *1.117@46545,18330 *1.117@46545,18450 *1.117@46545,18570 *1.117@46545,18690 *1.117@46545,18810 *1.117@46545,18930 *1.117@46545,19050 *1.117@46545,19170 *1.117@46545,19290 *1.117@46545,19410
  Bottom Layer w10: 4.15@46375,19179.96 46375,19205 46400,19230 v2(46545,19230)
Net*1_118: 4.14 *1.118 | length 2267.3
  Top Layer w30: *1.118@46725,17610 *1.118@46725,17730 *1.118@46725,17850 *1.118@46725,17970 *1.118@46725,18090 *1.118@46725,18210 *1.118@46725,18330 *1.118@46725,18450 *1.118@46725,18570 *1.118@46725,18690 *1.118@46725,18810 *1.118@46725,18930 *1.118@46725,19050 *1.118@46725,19170 *1.118@46725,19290 *1.118@46725,19410
  Bottom Layer w10: 4.14@46325,19179.96 46325,19210 46380,19265 46690,19265 v2(46725,19230)
Net*1_119: 4.13 *1.119 | length 2537.2
  Top Layer w30: *1.119@46910,17610 *1.119@46910,17730 *1.119@46910,17850 *1.119@46910,17970 *1.119@46910,18090 *1.119@46910,18210 *1.119@46910,18330 *1.119@46910,18450 *1.119@46910,18570 *1.119@46910,18690 *1.119@46910,18810 *1.119@46910,18930 *1.119@46910,19050 *1.119@46910,19170 *1.119@46910,19290 *1.119@46910,19410
  Bottom Layer w10: 4.13@46275,19179.96 46275,19220 46355,19300 46840,19300 v2(46910,19230)
Net*1_120: 4.12 *1.120 | length 2767.2
  Top Layer w30: *1.120@47090,17610 *1.120@47090,17730 *1.120@47090,17850 *1.120@47090,17970 *1.120@47090,18090 *1.120@47090,18210 *1.120@47090,18330 *1.120@47090,18450 *1.120@47090,18570 *1.120@47090,18690 *1.120@47090,18810 *1.120@47090,18930 *1.120@47090,19050 *1.120@47090,19170 *1.120@47090,19290 *1.120@47090,19410
  Bottom Layer w10: 4.12@46225,19179.96 46225,19225 46335,19335 47080,19335 47090,19345 v2(47090,19352.5)
Net*1_121: 3.19 *1.121 | length 2835.9
  Top Layer w30: *1.121@47270,17605 47270,18205 *1.121@47270,19405
  Bottom Layer w10: v2(47270,18995) 47285,19010 47470,19010 48085,19010 48205,19130 3.19@48205,19174.96
Net*1_122: 3.18 *1.122 | length 2620.4
  Top Layer w30: *1.122@47450,17605 *1.122@47450,18930 *1.122@47450,19050 *1.122@47450,19405
  Bottom Layer w10: v2(47450,19110) 47525,19035 48060,19035 48155,19130 3.18@48155,19174.96
Net*1_123: 3.17 *1.123 | length 2359.7
  Top Layer w30: *1.123@47635,17605 47635,18205 *1.123@47635,18930 *1.123@47635,19050 *1.123@47635,19405
  Bottom Layer w10: v2(47635,19105) 47680,19060 48030,19060 48105,19135 3.17@48105,19174.96
Net*1_124: 3.16 *1.124 | length 2106.9
  Top Layer w30: *1.124@47815,17605 47815,18205 *1.124@47815,19050 *1.124@47815,19405
  Bottom Layer w10: v2(47815,19110) 47835,19090 48010,19090 48055,19135 3.16@48055,19174.96
Net*1_125: 3.15 *1.125 | length 1864.1
  Top Layer w30: *1.125@47995,17605 47995,19045 *1.125@47995,19050 *1.125@47995,19170 *1.125@47995,19405
  Bottom Layer w10: v2(47995,19115) 48005,19125 3.15@48005,19174.96